# Altium PCB Sensor.PcbDoc
Units mm, origin at the board's own origin, x right, y up, seen from the top; angles counter-clockwise.
Board outline 70 x 27 mm, 2 copper layers (Top Layer, Bottom Layer); 46 components, 18 nets, 107 pads, 0 vias.
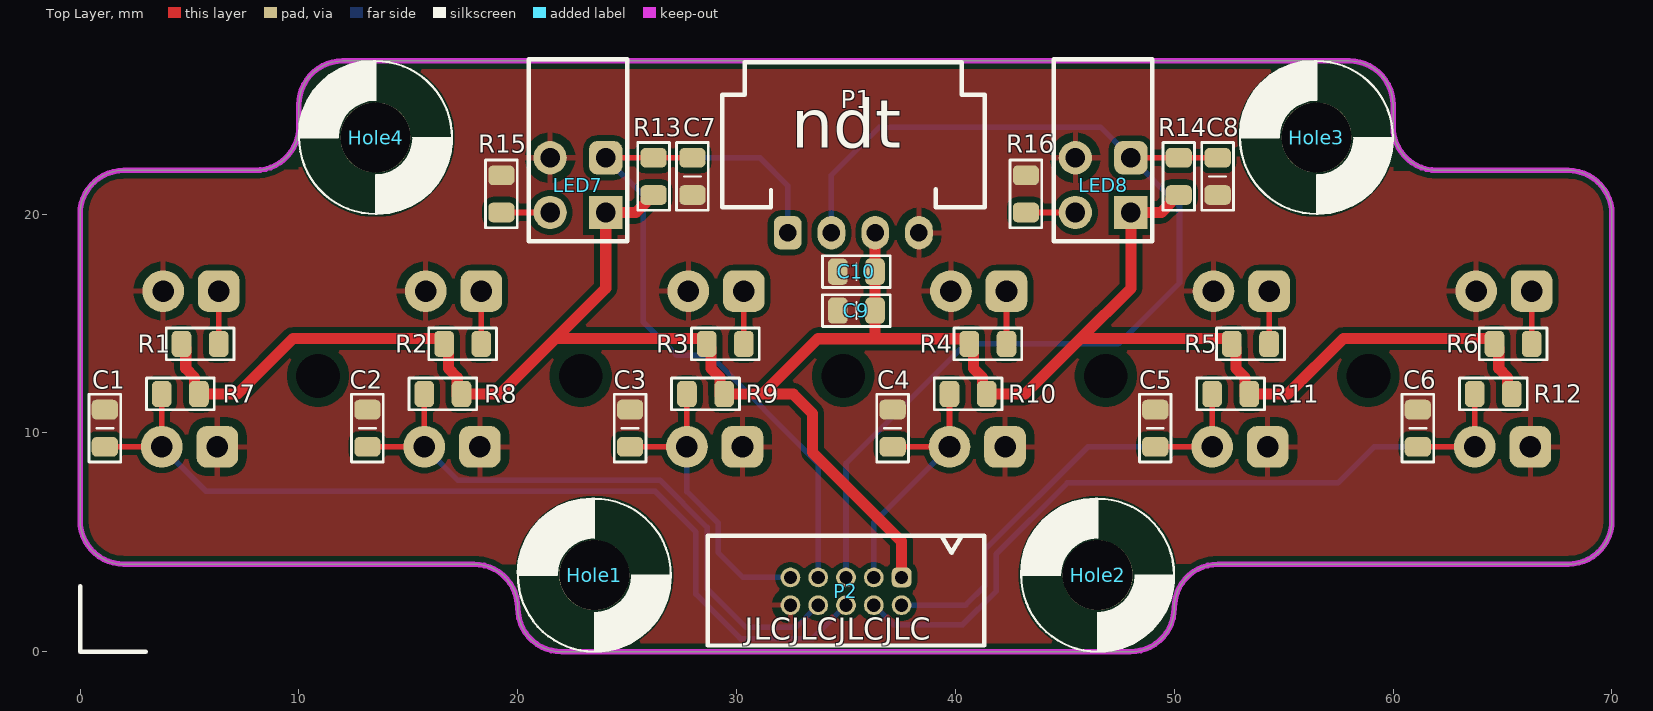
[diagram p0: Top Layer view]
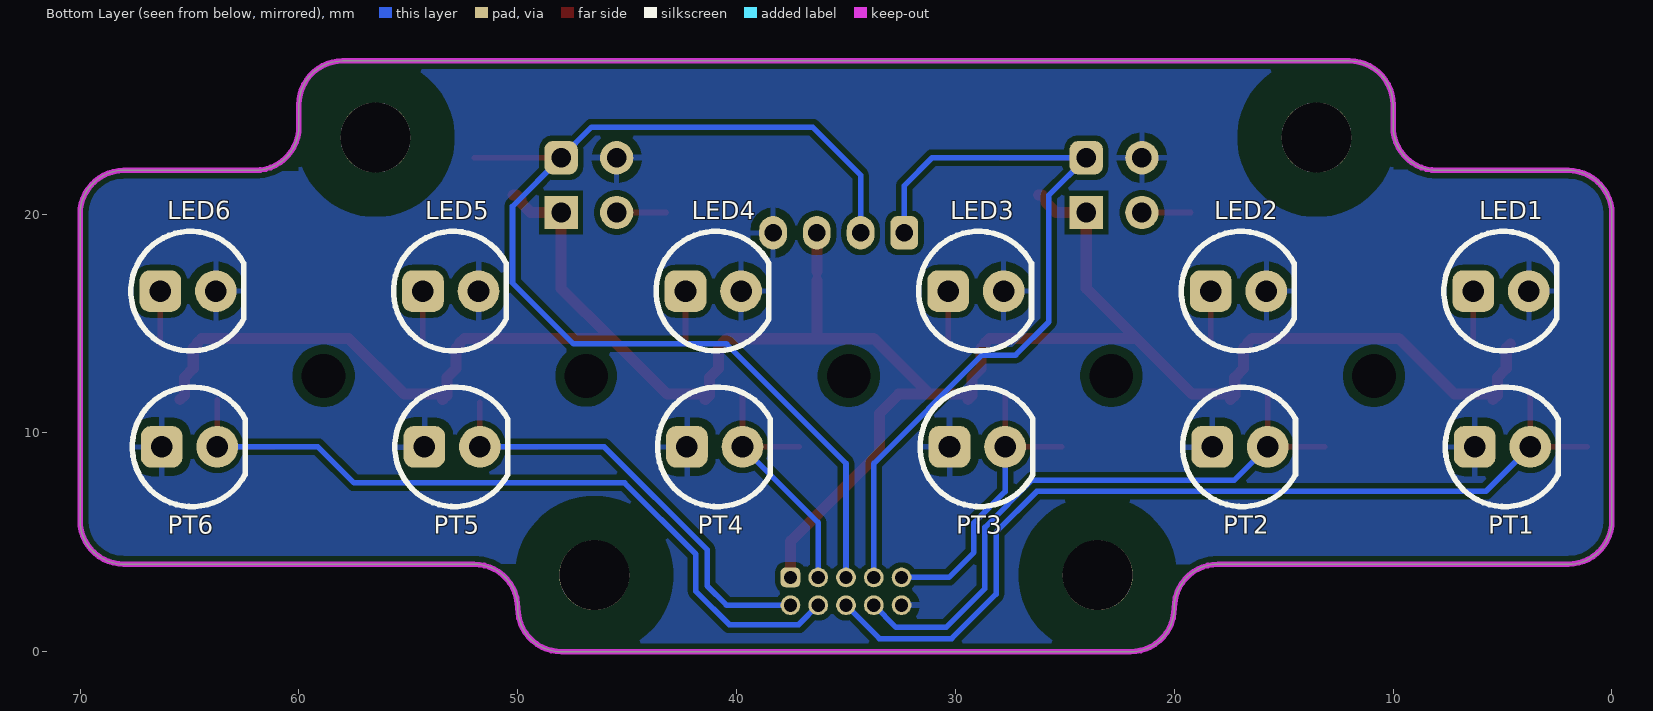
[diagram p1: Bottom Layer view, seen from below]
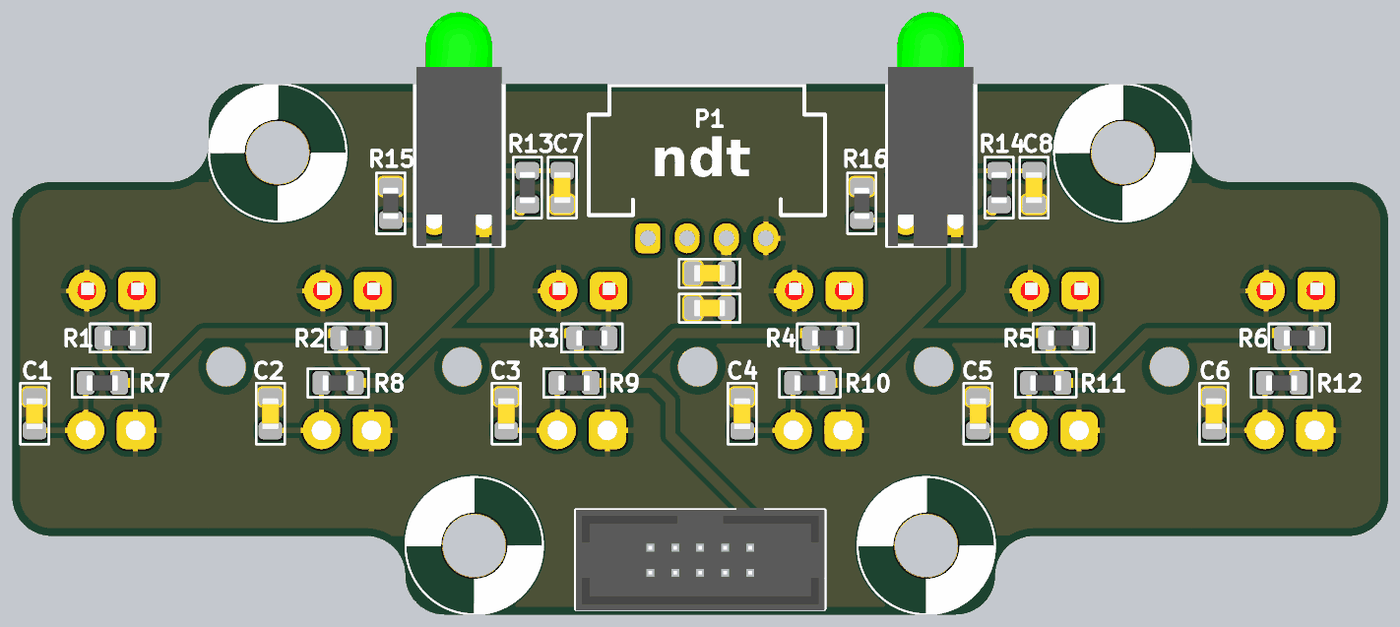
[diagram p2: 3D render of the assembled board from above, using the file's embedded part models]
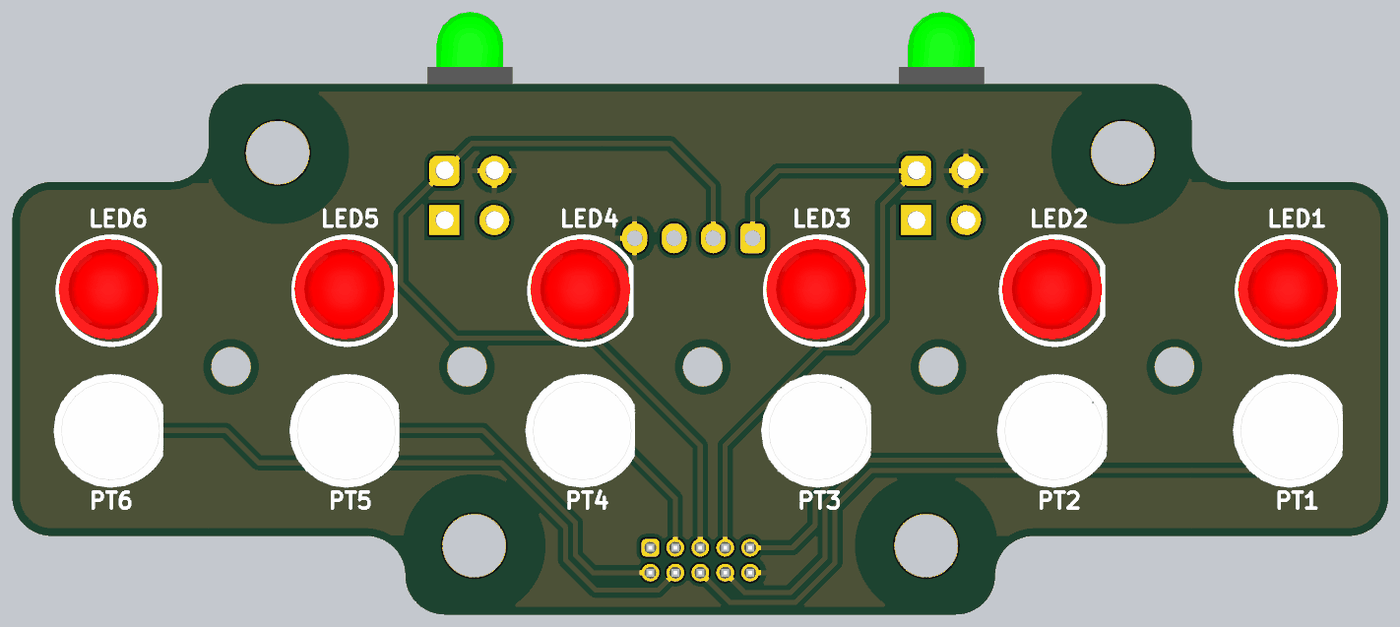
[diagram p3: 3D render of the assembled board from below, using the file's embedded part models]

## Layer stack, top to bottom
Top Solder: solder mask 0.0102, Solder Resist, Dk 3.5
Top Layer: signal copper 0.0356
Dielectric 1: dielectric 0.32, FR-4, Dk 4.8
Bottom Layer: signal copper 0.0356
Bottom Solder: solder mask 0.0102, Solder Resist, Dk 3.5

## Board outline
0,6 ccw(c2,6) 2,4 18,4 cw(c18,2) 20,2 ccw(c22,2) 22,0 48,0 ccw(c48,2) 50,2 cw(c52,2) 52,4 68,4 ccw(c68,6) 70,6 70,20 ccw(c68,20) 68,22 62,22 cw(c62,24) 60,24 60,25 ccw(c58,25) 58,27 12,27 ccw(c12,25) 10,25 10,24 cw(c8,24) 8,22 2,22 ccw(c2,20) 0,20

## Design rules (kind name [scope] priority, off if disabled: settings)
Clearance [All] p1: gap=0.254 ignorepadtopadclearanceinfootprint=FALSE except(0: Arc-Hole Track-Hole SMDPad-Hole THPad-Hole Via-Hole Fill-Hole Poly-Hole Region-Hole Text-Hole)
PolygonConnect [All] p1: thpad.connectstyle=Relief thpad.reliefconductorwidth=0.254 thpad.reliefentries=4 thpad.polygonreliefangle="90 Angle" thpad.airgapwidth=0.381 smdpad.connectstyle=Direct smdpad.reliefconductorwidth=0.254 smdpad.reliefentries=4 smdpad.polygonreliefangle="90 Angle" smdpad.airgapwidth=0.254 via.connectstyle=Direct via.reliefconductorwidth=0.254 via.reliefentries=4 via.polygonreliefangle="90 Angle" via.airgapwidth=0.254
RoutingVias [All] p1: holewidth=0.711 width=1.27 viastyle="Through Hole" minholewidth=0.711 minwidth=1.27 maxholewidth=0.711 maxwidth=1.27
SolderMaskExpansion [All] p1: expansion=0.102 istentingtop=FALSE
Width [All] p1: maxlimit=0.762 minlimit=0.254 preferedwidth=0.254
30 further rules are at their usual default settings.

## Components (designator, comment, footprint, x,y, rotation, side; value= is the part's Value field where it differs from the comment)
C1 "100pF" "C 0603 (1608)" 1.131,10.216 r90 top
C2 "100pF" "C 0603 (1608)" 13.131,10.216 r90 top
C3 "100pF" "C 0603 (1608)" 25.131,10.216 r90 top
C4 "100pF" "C 0603 (1608)" 37.131,10.216 r90 top
C5 "100pF" "C 0603 (1608)" 49.131,10.216 r90 top
C6 "100pF" "C 0603 (1608)" 61.131,10.216 r90 top
C7 "100pF" "C 0603 (1608)" 27.984,21.724 r270 top
C8 "100pF" "C 0603 (1608)" 51.984,21.724 r270 top
C9 "10uF" "C 0603 (1608)" 35.477,15.589 r180 top
C10 "100nF" "C 0603 (1608)" 35.477,17.367 r180 top
Hole1 "3mm" SCREW/3M/7M 23.5,3.5 r0 top
Hole2 "3mm" SCREW/3M/7M 46.5,3.5 r0 top
Hole3 "3mm" SCREW/3M/7M 56.5,23.5 r0 top
Hole4 "3mm" SCREW/3M/7M 13.5,23.5 r0 top
LED1 "Led-Red" "LED 5MM" 6.334,16.478 r180 bottom
LED2 "Led-Red" "LED 5MM" 18.334,16.478 r180 bottom
LED3 "Led-Red" "LED 5MM" 30.334,16.478 r180 bottom
LED4 "Led-Red" "LED 5MM" 42.334,16.478 r180 bottom
LED5 "Led-Red" "LED 5MM" 54.334,16.478 r180 bottom
LED6 "Led-Red" "LED 5MM" 66.334,16.478 r180 bottom
LED7 "LED F2/3MM 90" "LED 2x3MM 90" 24.019,22.574 r180 top
LED8 "LED F2/3MM 90" "LED 2x3MM 90" 48.019,22.574 r180 top
P1 "HY2.0-4P" HY2.0-4P-RA 32.334,19.145 r0 top
P2 "Header 5X2" DC3-10P-1.27MM 37.54,2.127 r180 top
PT1 "QT523C" "QT523C 5800B" 6.27,9.366 r180 bottom
PT2 "QT523C" "QT523C 5800B" 18.27,9.366 r180 bottom
PT3 "QT523C" "QT523C 5800B" 30.27,9.366 r180 bottom
PT4 "QT523C" "QT523C 5800B" 42.27,9.366 r180 bottom
PT5 "QT523C" "QT523C 5800B" 54.27,9.366 r180 bottom
PT6 "QT523C" "QT523C 5800B" 66.27,9.366 r180 bottom
R1 "330R" "R 0603 (1608)" 5.484,14.065 r180 top
R2 "330R" "R 0603 (1608)" 17.484,14.065 r180 top
R3 "330R" "R 0603 (1608)" 29.484,14.065 r180 top
R4 "330R" "R 0603 (1608)" 41.484,14.065 r180 top
R5 "330R" "R 0603 (1608)" 53.484,14.065 r180 top
R6 "330R" "R 0603 (1608)" 65.484,14.065 r180 top
R7 "10k" "R 0603 (1608)" 4.58,11.779 r0 top
R8 "10k" "R 0603 (1608)" 16.58,11.779 r0 top
R9 "10k" "R 0603 (1608)" 28.58,11.779 r0 top
R10 "10k" "R 0603 (1608)" 40.58,11.779 r0 top
R11 "10k" "R 0603 (1608)" 52.58,11.779 r0 top
R12 "10k" "R 0603 (1608)" 64.58,11.779 r0 top
R13 "10k" "R 0603 (1608)" 26.206,21.724 r90 top
R14 "10k" "R 0603 (1608)" 50.206,21.724 r90 top
R15 "330R" "R 0603 (1608)" 19.252,20.924 r90 top
R16 "330R" "R 0603 (1608)" 43.221,20.924 r90 top

## Footprints (in the part's own frame and the unit in brackets; to place one, negate y for a bottom-side part, rotate by r counter-clockwise, add the part's x,y. Pads: shape width x height; smd on the part's side, far side on the other; paste and mask are expansions set on the pad)
"C 0603 (1608)" [mm] "Chip Capacitor, 2-Leads, Body 1.6x0.8mm, IPC Medium Density"
  rrect50% 0.9x1.2 smd: 1(-0.85,0) 2(0.85,0)
  silkscreen extent -1.55,-0.72 1.55,0.72, body extent -0.8,-0.43 0.8,0.43, height 0.81
DC3-10P-1.27MM [mm]
  rrect50% 0.9x0.9 hole 0.6: 1(0,-1.27)
  round 0.9 hole 0.6: 2(0,0) 3(1.27,-1.27) 4(1.27,0) 5(2.54,-1.27) 6(2.54,0) 7(3.81,-1.27) 8(3.81,0) 9(5.08,-1.27) 10(5.08,0)
  silkscreen extent -3.78,-3.18 8.86,1.84, body extent -3.78,-3.29 8.87,1.91, height 5.4
HY2.0-4P-RA [mm]
  rrect50% 1.27x1.524 hole 0.8: 1(0,0)
  oval 1.27x1.524 hole 0.8: 2(2,0) 3(4,0) 4(6,0)
  silkscreen extent -3,1.18 9,7.8
"LED 2x3MM 90" [mil]
  rrect50% 60x60 hole 35.43: 1(0,0)
  round 60 hole 35.43: 2(100,0) 4(100,98.43)
  rect 60x60 hole 35.43: 3(0,98.43)
  silkscreen extent -39,-177 139,150, body extent -34,-318 136,150, height 380
"LED 5MM" [mil]
  rrect50% 75x75 hole 39: 1(0,0)
  round 75 hole 39: 2(100,0)
  silkscreen extent -53,-108 150,108, body extent -52,-97 149,103, height 339
"QT523C 5800B" [mil]
  rrect50% 75x75 hole 39: 1(0,0)
  round 75 hole 39: 2(100,0)
  silkscreen extent -53,-108 150,108, body extent -64,-115 156,113, height 211
"R 0603 (1608)" [mm] "Chip Resistor, 2-Leads, Body 1.6x0.8mm, IPC Medium Density"
  rrect50% 0.9x1.2 smd: 1(-0.85,0) 2(0.85,0)
  silkscreen extent -1.55,-0.72 1.55,0.72, body extent -0.8,-0.4 0.8,0.4, height 0.5
SCREW/3M/7M [mm]
  round 3.2 hole 3.2: 1(0,0)
  silkscreen extent -3.54,-3.53 3.53,3.54

## Part data
C1 C2 C3 C4 C5 C6 C7 C8 C9 C10: library part "Capacitor NP", "Capacitor non-pol"
Hole1 Hole2 Hole3 Hole4: library part Screw
LED1 LED2 LED3 LED4 LED5 LED6: library part Led, "Typical LED"
LED7 LED8: "Typical LED"
P1: library part "Header 4", "Header, 4-Pin"
P2: "Header, 5-Pin, Dual row", LatestRevisionDate=17-Jul-2002, LatestRevisionNote="Re-released for DXP Platform.", Publisher="Altium Limited"
PT1 PT2 PT3 PT4 PT5 PT6: "PHOTODIODE 5800B"
R1 R2 R3 R4 R5 R6 R7 R8 R9 R10 R11 R12 R13 R14 R15 R16: library part Resistor, "Resistor", LatestRevisionDate=17-Jul-2002, LatestRevisionNote="Re-released for DXP Platform.", PackageReference=AXIAL-0.3, Published=8-Jun-2000, Publisher="Altium Limited"

## Free pads (board coordinates)
  round 0 hole 2: 6(10.874,12.605) 7(22.874,12.605) 8(34.874,12.605) 9(46.874,12.605) 10(58.874,12.605)

## Nets (pads, with @x,y where several pads share a name; then routed paths per layer and width w, separated by ;. In a path a pad name is that pad's centre, name@x,y a point inside that pad or via, vN(x,y) a via of type N, cw(c..) or ccw(c..) an arc to the next point about the centre after c; other vN are vias at no path point)
3V3: C9.1 C10.1 LED7.3 LED8.3 P1.3 P2.1 R1.2 R2.2 R3.2 R4.2 R5.2 R6.2 R7.2 R8.2 R9.2 R10.2 R11.2 R12.2 R13.1 R14.1 | length 114.2
  Top Layer w0.508: R1.2 4.83,13.869 4.83,12.937 5.234,12.533 5.234,11.721 R7.2@5.43,11.525 ; R7.2 7.187,11.779 9.727,14.319 16.438,14.319 16.634,14.123 R2.2 16.83,13.869 16.83,12.937 17.234,12.533 17.234,11.721 R8.2@17.43,11.525 ; R8.2 19.187,11.779 21.727,14.319 ; R13.1 26.056,20.874 25.86,20.678 25.86,20.528 25.406,20.074 LED7.3 24.019,16.611 21.727,14.319 ; R9.2@29.43,11.525 29.234,11.721 29.234,12.533 28.83,12.937 28.83,13.869 R3.2 28.634,14.123 28.438,14.319 21.727,14.319 ; R9.2 31.187,11.779 ; C10.1@36.327,16.986 C9.1 36.327,14.305 ; C10.1 36.33,17.371 36.33,19.141 P1.3 ; P2.1 37.54,5.048 33.476,9.112 33.476,10.89 32.587,11.779 31.187,11.779 ; R4.2@40.577,14.122 40.83,13.869 40.83,12.937 41.234,12.533 41.234,11.721 R10.2@41.43,11.525 ; R4.2 40.634,14.109 40.438,14.305 36.327,14.305 ; R10.2 43.187,11.779 45.727,14.319 ; R14.1 50.056,20.874 49.86,20.678 49.86,20.528 49.406,20.074 LED8.3 48.019,16.611 45.727,14.319 ; R11.2@53.43,11.525 53.234,11.721 53.234,12.533 52.83,12.937 52.83,13.869 R5.2 52.634,14.123 52.438,14.319 45.727,14.319 ; R11.2 55.187,11.779 57.727,14.319 64.438,14.319 64.634,14.123 R6.2 64.83,13.869 64.83,12.937 65.234,12.533 65.234,11.721 R12.2@65.43,11.525 ; 31.187,11.779 33.713,14.305 36.327,14.305
ADC1_IN8: C8.1 LED8.1 P1.2 P2.5 R14.2 | length 52.3
  Top Layer w0.254: LED8.1 R14.2 C8.1
  Bottom Layer w0.254: P1.2 34.334,21.781 36.524,23.971 46.622,23.971 LED8.1 50.24,20.353 50.24,16.859 47.446,14.065 40.461,14.065 35,8.604 P2.5
ADC1_IN9: C4.1 P2.3 PT4.2 R10.1 | length 12.3
  Top Layer w0.254: C4.1 PT4.2 R10.1@39.73,11.652
  Bottom Layer w0.254: P2.3 36.27,5.906 PT4.2
ADC1_IN10: C2.1 P2.8 PT2.2 R8.1 | length 28.6
  Top Layer w0.254: C2.1 PT2.2 R8.1 R8.1@15.73,11.906
  Bottom Layer w0.254: PT2.2 17.254,7.842 26.491,7.842 28.65,5.683 28.65,2.889 30.428,1.111 32.714,1.111 P2.8
ADC1_IN11: C1.1 P2.6 PT1.2 R7.1 | length 42.2
  Top Layer w0.254: C1.1 PT1.2 R7.1
  Bottom Layer w0.254: PT1.2 5.762,7.334 26.281,7.334 28.142,5.473 28.142,2.635 30.174,0.603 33.476,0.603 P2.6
ADC1_IN12: C6.1 P2.4 PT6.2 R12.1 | length 36.9
  Top Layer w0.254: C6.1 PT6.2 R12.1@63.73,11.525
  Bottom Layer w0.254: P2.4 37.159,1.238 40.334,1.238 41.858,2.762 41.858,4.457 45.116,7.715 57.479,7.715 59.13,9.366 PT6.2
ADC1_IN13: C5.1 P2.2 PT5.2 R11.1 | length 22.8
  Top Layer w0.254: C5.1 PT5.2 R11.1@51.73,11.398
  Bottom Layer w0.254: P2.2 40.461,2.127 41.35,3.016 41.35,4.667 46.049,9.366 PT5.2
ADC1_IN14: C3.1 P2.9 PT3.2 R9.1 | length 14.2
  Top Layer w0.254: C3.1 PT3.2 R9.1
  Bottom Layer w0.254: PT3.2 27.73,7.321 29.158,5.893 29.158,4.54 30.301,3.397 P2.9
ADC1_IN15: C7.1 LED7.1 P1.1 P2.7 R13.2 | length 39.1
  Top Layer w0.254: LED7.1 R13.2 C7.1
  Bottom Layer w0.254: P1.1 32.334,21.303 31.063,22.574 LED7.1 25.729,20.864 25.729,15.081 27.253,13.557 28.777,13.557 33.73,8.604 P2.7
GND: C1.2 C2.2 C3.2 C4.2 C5.2 C6.2 C7.2 C8.2 C9.2 C10.2 LED1.2 LED2.2 LED3.2 LED4.2 LED5.2 LED6.2 LED7.2 LED8.2 P1.4 P2.10 PT1.1 PT2.1 PT3.1 PT4.1 PT5.1 PT6.1 R15.2 R16.2
NetLED1_1: LED1.1 R1.1 | length 2.4
  Top Layer w0.254: R1.1 LED1.1
NetLED2_1: LED2.1 R2.1 | length 2.4
  Top Layer w0.254: R2.1 LED2.1
NetLED3_1: LED3.1 R3.1 | length 2.4
  Top Layer w0.254: R3.1 LED3.1
NetLED4_1: LED4.1 R4.1 | length 2.4
  Top Layer w0.254: R4.1 LED4.1
NetLED5_1: LED5.1 R5.1 | length 2.4
  Top Layer w0.254: R5.1 LED5.1
NetLED6_1: LED6.1 R6.1 | length 2.4
  Top Layer w0.254: R6.1 LED6.1
NetLED7_4: LED7.4 R15.1 | length 2.2
  Top Layer w0.254: R15.1 LED7.4
NetLED8_4: LED8.4 R16.1 | length 2.3
  Top Layer w0.254: R16.1 LED8.4
pads on no net: Hole1.1 Hole2.1 Hole3.1 Hole4.1

## Polygon pours and split planes (outlines as drawn)
GND on Top Layer "GND_L01_P000" (solid, pour order 0): 0,4.032 0,22.015 9.995,22.015 9.995,26.994 60.005,26.994 60.005,21.964 69.976,21.964 69.976,4.032 49.961,4.032 49.961,0.019 19.989,0.019 19.989,4.007 11.886,4.007
GND on Bottom Layer "GND_L02_P001" (solid, pour order 1): 0,4.032 0,22.015 9.995,22.015 9.995,26.994 60.005,26.994 60.005,21.964 69.976,21.964 69.976,4.032 49.961,4.032 49.961,0.019 19.989,0.019 19.989,4.007 11.886,4.007

## Keep-outs
Keep-Out Layer:
  the board outline again, w0.254

## Other copper
Top Layer:
  pour cut-out: 9.871,23.5 ccw(c13.5,23.5) 13.5,19.871 ccw(c13.5,23.5) 17.129,23.5 ccw(c13.5,23.5) 13.5,27.129 ccw(c13.5,23.5)
  pour cut-out: 52.871,23.5 ccw(c56.5,23.5) 56.5,19.871 ccw(c56.5,23.5) 60.129,23.5 ccw(c56.5,23.5) 56.5,27.129 ccw(c56.5,23.5)
  pour cut-out: 42.871,3.5 ccw(c46.5,3.5) 46.5,-0.129 ccw(c46.5,3.5) 50.129,3.5 ccw(c46.5,3.5) 46.5,7.129 ccw(c46.5,3.5)
  pour cut-out: 19.871,3.5 ccw(c23.5,3.5) 23.5,-0.129 ccw(c23.5,3.5) 27.129,3.5 ccw(c23.5,3.5) 23.5,7.129 ccw(c23.5,3.5)
  pour cut-out: 57.46,12.605 ccw(c58.874,12.605) 58.874,11.191 ccw(c58.874,12.605) 60.287,12.605 ccw(c58.874,12.605) 58.874,14.018 ccw(c58.874,12.605)
  pour cut-out: 45.46,12.605 ccw(c46.874,12.605) 46.874,11.191 ccw(c46.874,12.605) 48.287,12.605 ccw(c46.874,12.605) 46.874,14.018 ccw(c46.874,12.605)
  pour cut-out: 33.46,12.605 ccw(c34.874,12.605) 34.874,11.191 ccw(c34.874,12.605) 36.287,12.605 ccw(c34.874,12.605) 34.874,14.018 ccw(c34.874,12.605)
  pour cut-out: 21.46,12.605 ccw(c22.874,12.605) 22.874,11.191 ccw(c22.874,12.605) 24.287,12.605 ccw(c22.874,12.605) 22.874,14.018 ccw(c22.874,12.605)
  pour cut-out: 9.46,12.605 ccw(c10.874,12.605) 10.874,11.191 ccw(c10.874,12.605) 12.287,12.605 ccw(c10.874,12.605) 10.874,14.018 ccw(c10.874,12.605)
Bottom Layer:
  pour cut-out: 9.871,23.5 ccw(c13.5,23.5) 13.5,19.871 ccw(c13.5,23.5) 17.129,23.5 ccw(c13.5,23.5) 13.5,27.129 ccw(c13.5,23.5)
  pour cut-out: 52.871,23.5 ccw(c56.5,23.5) 56.5,19.871 ccw(c56.5,23.5) 60.129,23.5 ccw(c56.5,23.5) 56.5,27.129 ccw(c56.5,23.5)
  pour cut-out: 42.871,3.5 ccw(c46.5,3.5) 46.5,-0.129 ccw(c46.5,3.5) 50.129,3.5 ccw(c46.5,3.5) 46.5,7.129 ccw(c46.5,3.5)
  pour cut-out: 19.871,3.5 ccw(c23.5,3.5) 23.5,-0.129 ccw(c23.5,3.5) 27.129,3.5 ccw(c23.5,3.5) 23.5,7.129 ccw(c23.5,3.5)
  pour cut-out: 57.46,12.605 ccw(c58.874,12.605) 58.874,11.191 ccw(c58.874,12.605) 60.287,12.605 ccw(c58.874,12.605) 58.874,14.018 ccw(c58.874,12.605)
  pour cut-out: 45.46,12.605 ccw(c46.874,12.605) 46.874,11.191 ccw(c46.874,12.605) 48.287,12.605 ccw(c46.874,12.605) 46.874,14.018 ccw(c46.874,12.605)
  pour cut-out: 33.46,12.605 ccw(c34.874,12.605) 34.874,11.191 ccw(c34.874,12.605) 36.287,12.605 ccw(c34.874,12.605) 34.874,14.018 ccw(c34.874,12.605)
  pour cut-out: 21.46,12.605 ccw(c22.874,12.605) 22.874,11.191 ccw(c22.874,12.605) 24.287,12.605 ccw(c22.874,12.605) 22.874,14.018 ccw(c22.874,12.605)
  pour cut-out: 9.46,12.605 ccw(c10.874,12.605) 10.874,11.191 ccw(c10.874,12.605) 12.287,12.605 ccw(c10.874,12.605) 10.874,14.018 ccw(c10.874,12.605)

## Silkscreen, mask and mechanical layers (free items; w line width, h text height)
Top Overlay:
  lines w0.203: 0,3 0,0 3,0
  text "ndt" at 32.496,22.296 h3.81
  text "JLCJLCJLCJLC" at 30.365,0.545 h1